# Altium PCB 2017-04-15_16-14-33.PcbDoc
Units mil, origin at the board's own origin, x right, y up, seen from the top; angles counter-clockwise.
Board outline 1500 x 1800 mil, 4 copper layers (Top Layer, MidLayer1, MidLayer2, Bottom Layer); 8 components, 4 nets, 19 pads, 23 vias.
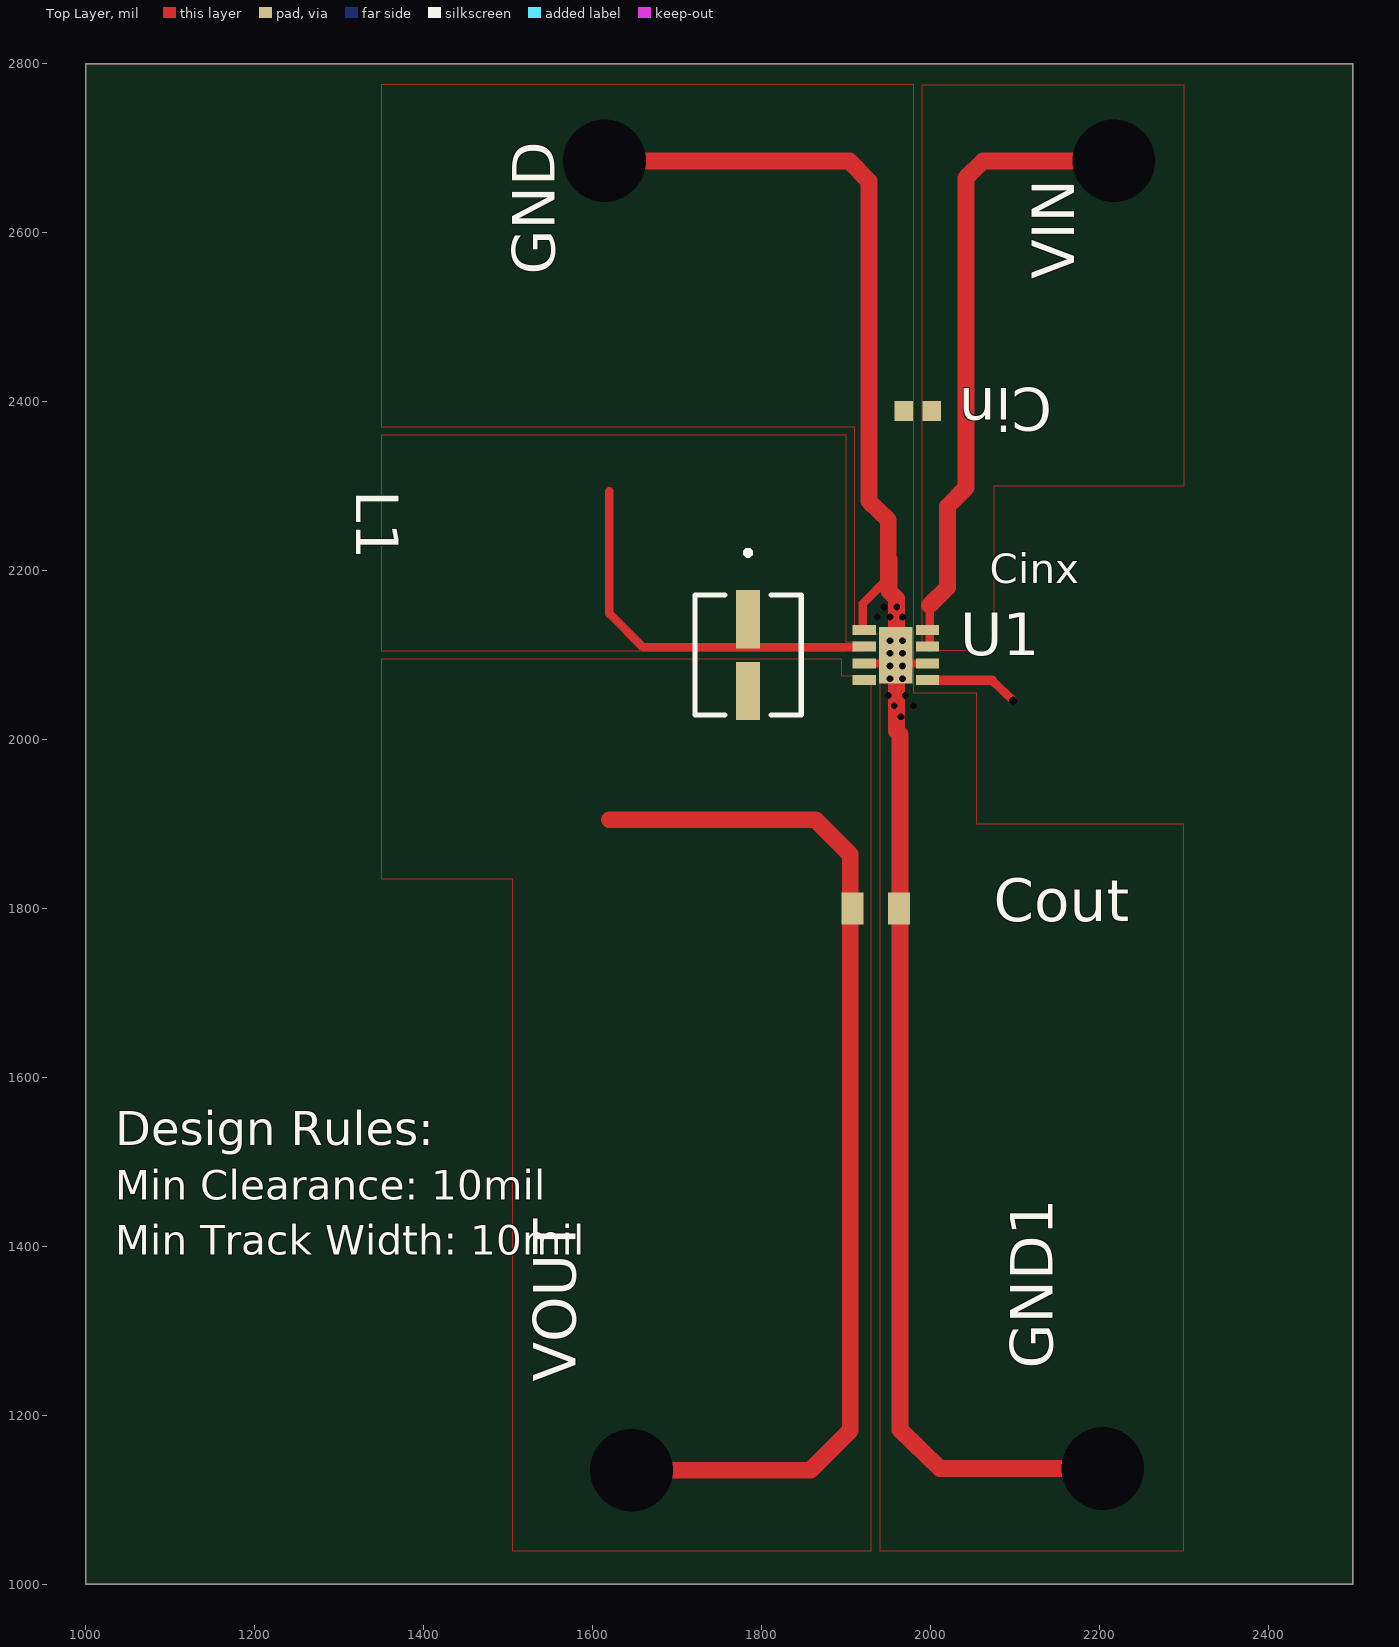
[diagram p0: Top Layer view]
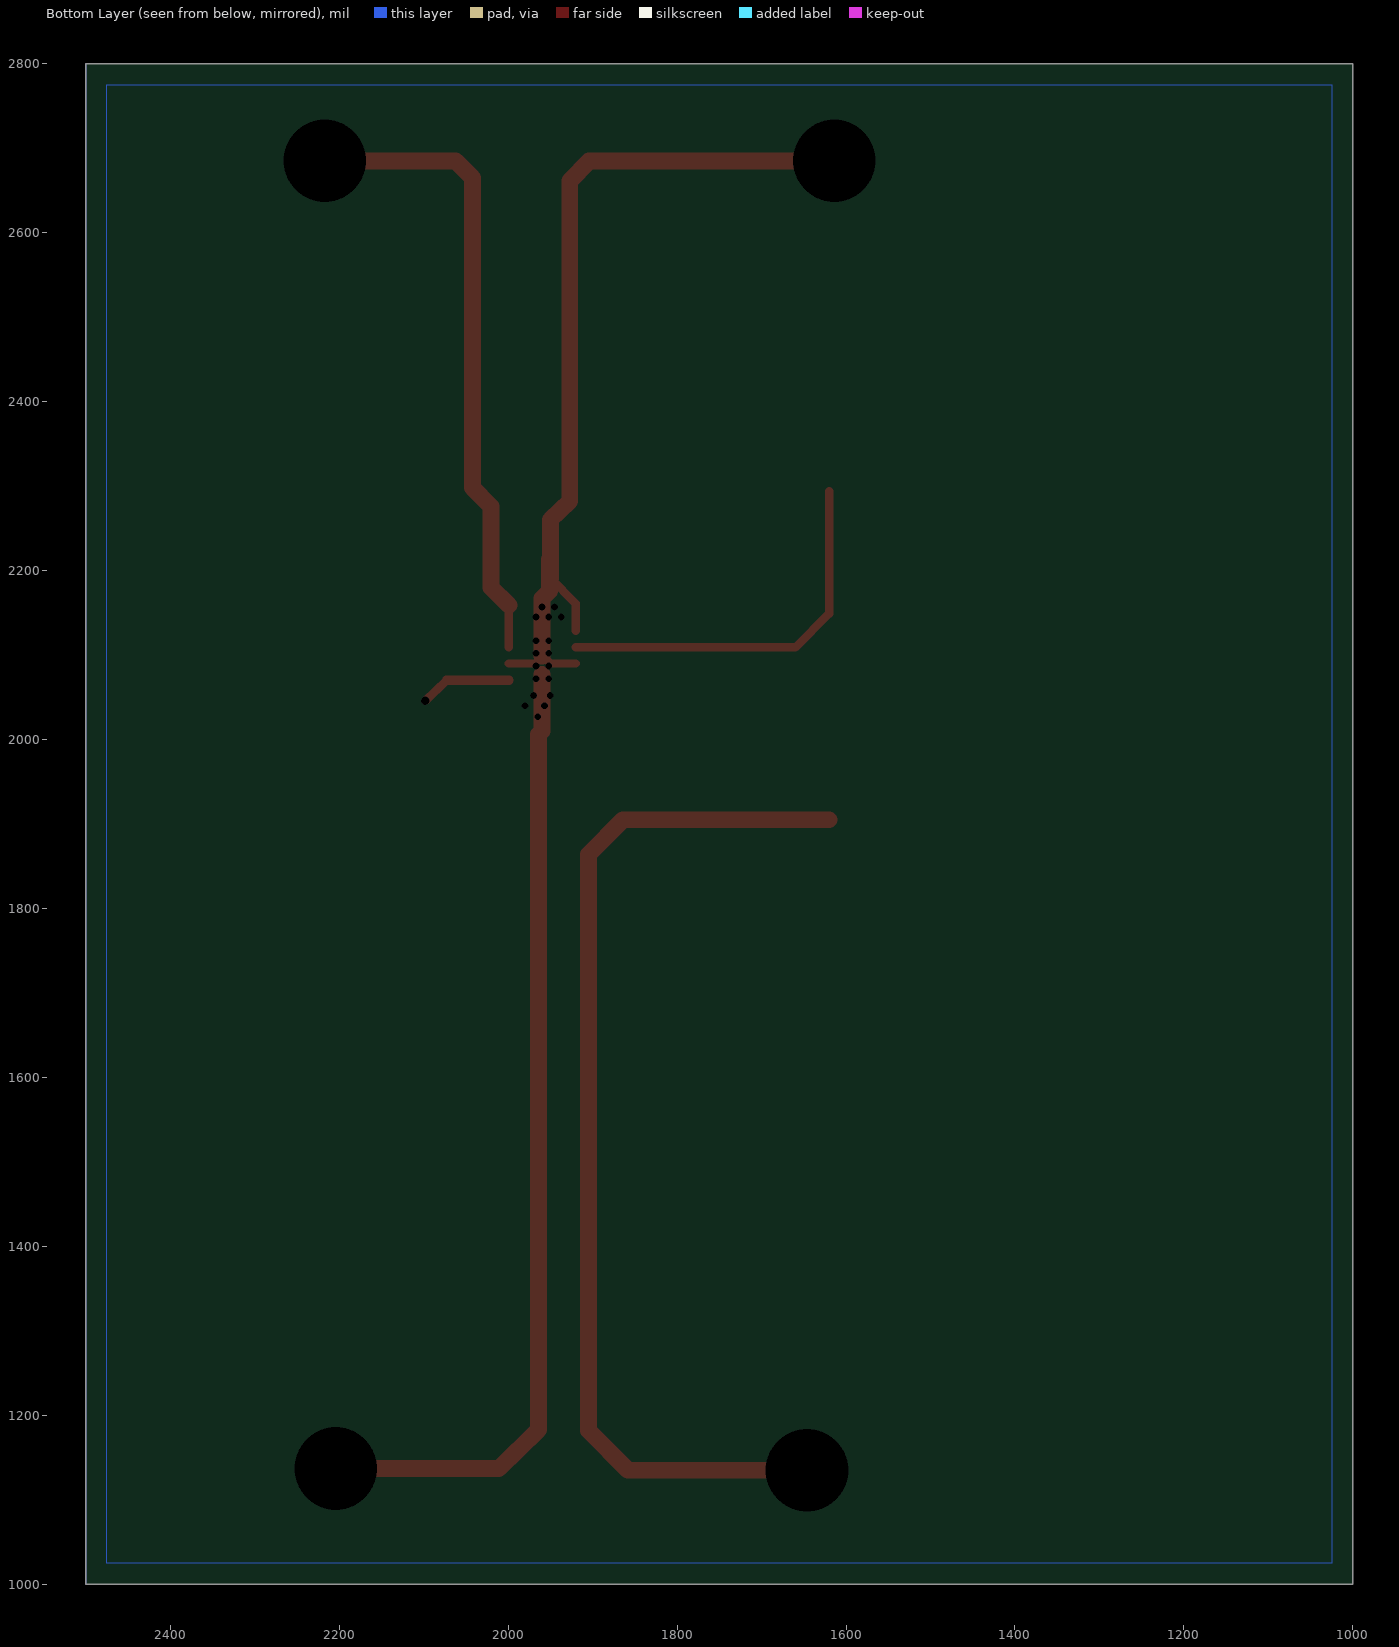
[diagram p1: Bottom Layer view, seen from below]
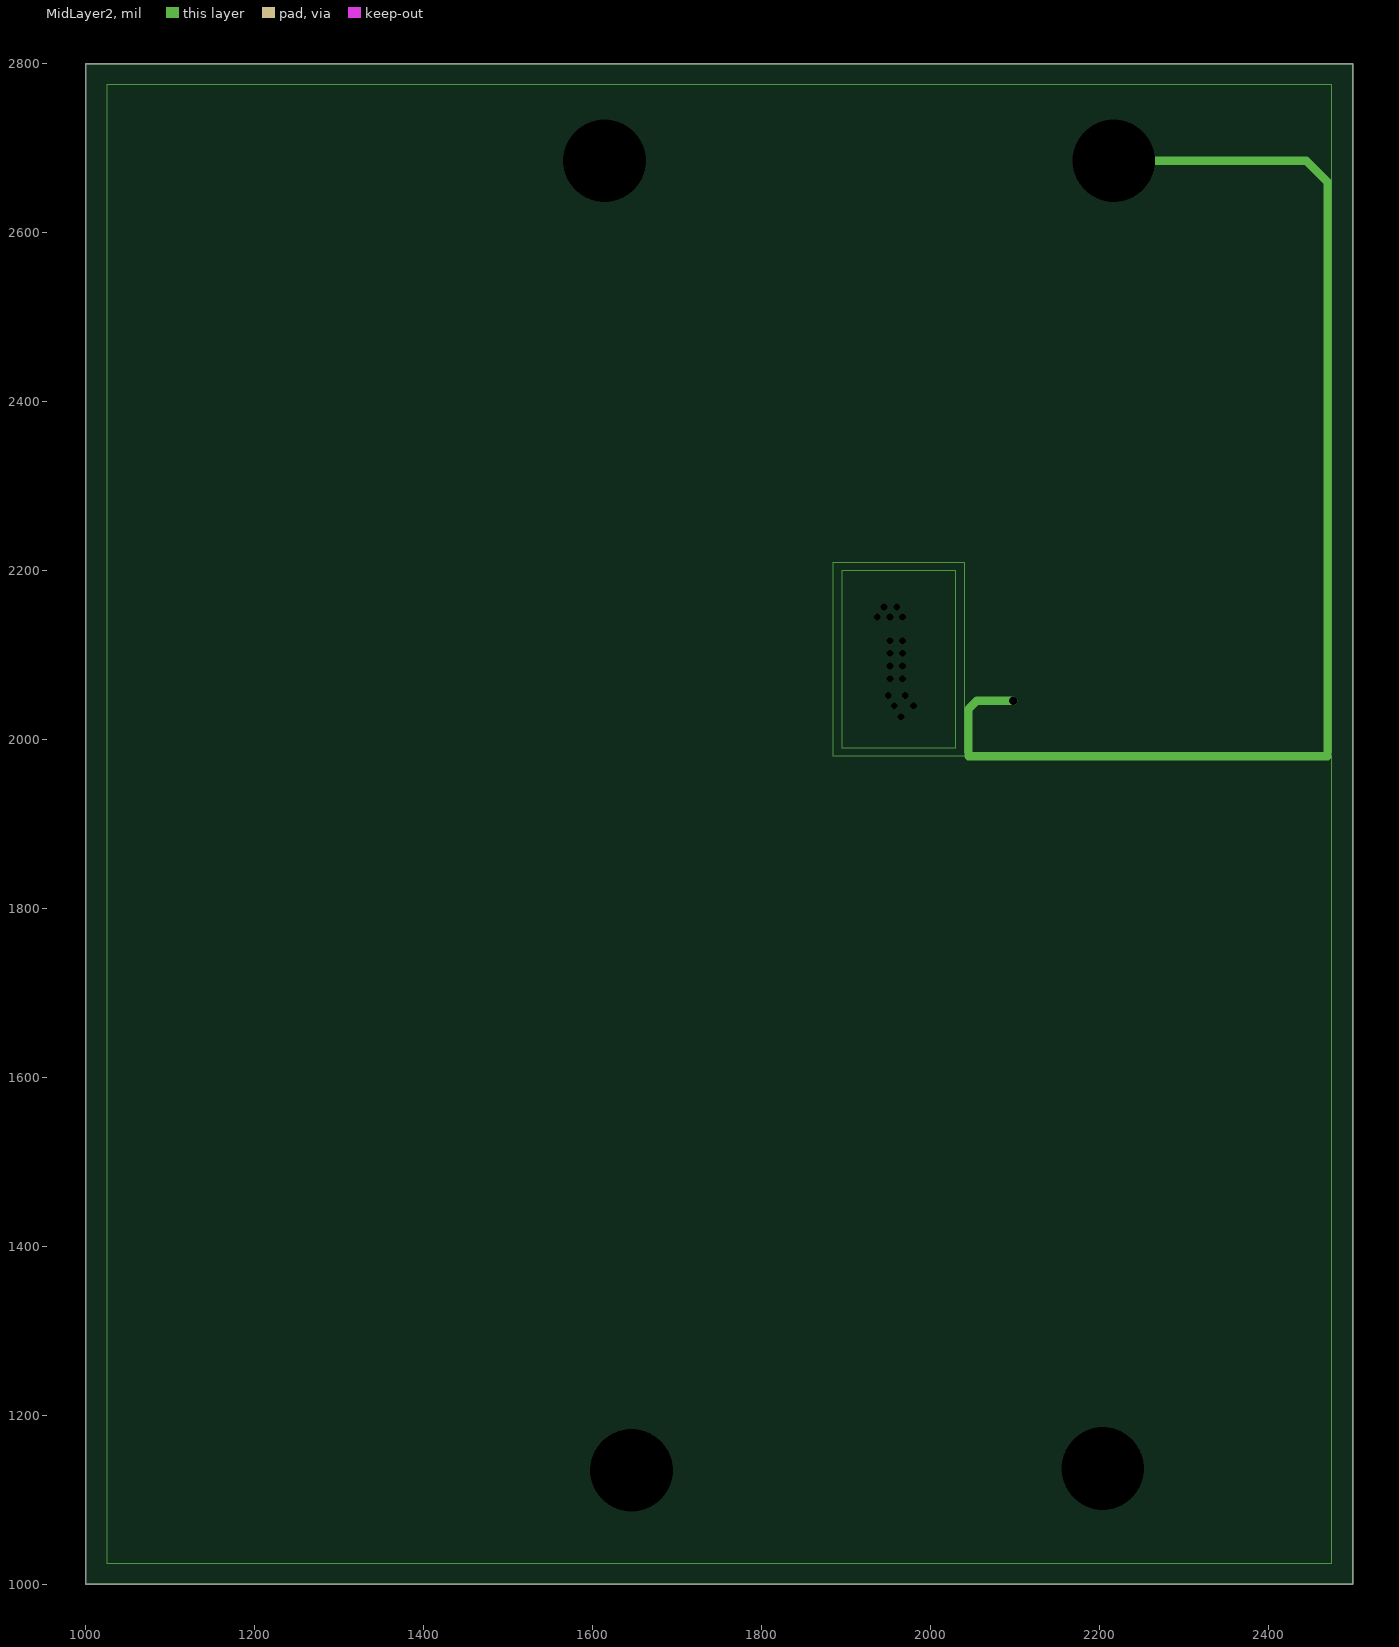
[diagram p2: MidLayer2]

## Layer stack, top to bottom
Top Layer: signal copper 1.4
Dielectric: core 12.6, FR-4, Dk 4.8
MidLayer1: signal copper 1.4
Dielectric: prepreg 12.6, FR-4, Dk 4.8
MidLayer2: signal copper 1.4
Dielectric: core 12.6, FR-4, Dk 4.8
Bottom Layer: signal copper 1.4

## Board outline
1000,1000 2500,1000 2500,2800 1000,2800

## Design rules (kind name [scope] priority, off if disabled: settings)
PlaneConnect [All] p0: scope1count=1 scope1_0_kind=Board scope1_0_value=Board scope2count=1 scope2_0_kind=Board scope2_0_value=Board commentlength=0 planeconnectstyle=Direct reliefexpansion=20 reliefentries=4 reliefconductorwidth=10 reliefairgap=10
PlaneConnect [All] p1: planeconnectstyle=Direct reliefexpansion=20 reliefentries=4 reliefconductorwidth=10 reliefairgap=10
PolygonConnect [All] p0: scope1count=1 scope1_0_kind=Board scope1_0_value=Board scope2count=1 scope2_0_kind=Board scope2_0_value=Board commentlength=0 connectstyle=Direct reliefconductorwidth=10 reliefentries=4 polygonreliefangle="90 Angle"
PolygonConnect [All] p1: connectstyle=Direct reliefconductorwidth=10 reliefentries=4 polygonreliefangle="90 Angle"

## Components (designator, comment, footprint, x,y, rotation, side; value= is the part's Value field where it differs from the comment)
Cin "" 0402 1985,2389 r180 top
Cout "" 0603 1935,1800 r0 top
GND "" TP-1502 1613,2685 r90 top
GND1 "" TP-1502 2203,1136 r90 top
L1 "" IHLP-1212AE 1784,2100 r270 top
U1 "" DSG0008A 1959,2100 r0 top
VIN "" TP-1502 2216,2685 r90 top
VOUT "" TP-1502 1645,1134 r90 top

## Footprints (in the part's own frame and the unit in brackets; to place one, negate y for a bottom-side part, rotate by r counter-clockwise, add the part's x,y. Pads: shape width x height; smd on the part's side, far side on the other; paste and mask are expansions set on the pad)
0402 [mil]
  rect 22x24 smd: 1(-16.5,0) 2(16.5,0)
0603 [mil]
  rect 26x38 smd: 1(-27.5,0) 2(27.5,0)
DSG0008A [mm]
  rect 0.705x0.3 smd: 1(-0.952,0.75) 2(-0.952,0.25) 3(-0.952,-0.25) 4(-0.952,-0.75) 5(0.952,-0.75) 6(0.952,-0.25) 7(0.952,0.25) 8(0.952,0.75)
  rect 1x1.7 smd: 9(0,0)
IHLP-1212AE [mil]
  rect 69x28 smd: 1(-42.5,0) 2(42.5,0)
  silkscreen extent -124,-63 71,63
TP-1502 [mil]
  round 65 / inner round 0 / far side round 65 hole 32: 1(0,0)

## Via types
v1: diameter 0, hole 8, Top Layer to Bottom Layer, 18 vias
v2: diameter 0, hole 98, Top Layer to Bottom Layer, 4 vias
v3: diameter 0, hole 10, Top Layer to Bottom Layer, 1 vias

## Nets (pads, with @x,y where several pads share a name; then routed paths per layer and width w, separated by ;. In a path a pad name is that pad's centre, name@x,y a point inside that pad or via, vN(x,y) a via of type N, cw(c..) or ccw(c..) an arc to the next point about the centre after c; other vN are vias at no path point)
0: Cin.2 Cout.2 GND1.1 GND.1 U1.1 U1.3 U1.6 U1.9 | length 2212.5
  Top Layer w10: U1.3@1920,2090 1950,2090 U1.9@1952,2092 ; U1.1@1920,2129 1920,2161 1950,2191 ; U1.9@1969,2090 U1.6@1999,2090
  Top Layer w20: v2(1614,2685) 1904,2685 1927,2661 1927,2445 1927,2282 1950,2260 1950,2191 ; 1951,2213 1951,2176 1960,2167 U1.9@1960,2099 ; U1.9@1960,2077 1960,2010 1964,2006 1964,1183 2011,1137 v2(2204,1137)
  other v1: 1965,2027 1957,2040 1980,2040 1950,2052 1970,2052 1952,2072 1967,2072 1952,2087 1967,2087 1952,2102 1967,2102 1952,2117 1967,2117 1937,2145 1952,2145 1967,2145 1945,2157 1960,2157
4: Cout.1 L1.2 U1.4 VOUT.1 | length 1262.5
  Top Layer w20: 1620,1905 1864,1905 1905,1864 1905,1182 1858,1135 v2(1646,1135)
6: Cin.1 U1.5 U1.7 U1.8 VIN.1 | length 2347.2
  Top Layer w10: U1.7@1999,2109 1999,2129 1999,2159 ; 2073,2070 v3(2098,2046)
  Top Layer w11: U1.5@1999,2070 2073,2070
  Top Layer w20: 1999,2159 2020,2180 2020,2276 2042,2298 2042,2445 2042,2665 2062,2685 v2(2217,2685)
  MidLayer2 w10: v3(2098,2046) 2055,2046 2045,2036 2045,1980 2470,1980 2470,2660 2445,2685 v2(2217,2685)
9: L1.1 U1.2 | length 461.6
  Top Layer w10: 1620,2294 1620,2149 1660,2109 U1.2@1920,2109

## Polygon pours and split planes (outlines as drawn)
4 on Top Layer " " (solid, pour order 1): 1505,1040 1930,1040 1930,2075 1895,2075 1895,2095 1350,2095 1350,1835 1505,1835
9 on Top Layer " " (solid, pour order 2): 1350,2360 1350,2105 1900,2105 1930,2115 1900,2115 1900,2360
6 on Top Layer " " (solid, pour order 3): 1990,2105 1990,2775 2300,2775 2300,2300 2075,2300 2075,2105
0 on Top Layer " " (solid, pour order 6): 1980,2775 1350,2775 1350,2370 1910,2370 1910,2125 1940,2125 1940,1040 2300,1040 2300,1900 2055,1900 2055,2055 1980,2055
6 on MidLayer2 " " (solid, pour order 0): 2475,2775 1025,2775 1025,1025 2475,1025 2475,1980 1885,1980 1885,2210 2040,2210 2040,1985 2475,1985
0 on Bottom Layer " " (solid, pour order 4): 2475,2775 1025,2775 1025,1025 2475,1025
0 on MidLayer2 " " (solid, pour order 5): 2030,2200 1895,2200 1895,1990 2030,1990
0 on MidLayer1 " " (solid, pour order 7): 2475,2775 1025,2775 1025,1025 2475,1025

## Other copper
Multi-Layer:
  the board outline again, w1

## Silkscreen, mask and mechanical layers (free items; w line width, h text height)
Top Overlay:
  text "Cinx" at 2070,2185 h35
  text "Design Rules:" at 1035,1520 h40
  text "Min Clearance: 10mil" at 1035,1455 h35
  text "Min Track Width: 10mil" at 1035,1390 h35